# Altium PCB E_LOAD_MARCH20 - backup.PcbDoc
Units mil, origin at the board's own origin, x right, y up, seen from the top; angles counter-clockwise.
Board outline 3220 x 3110 mil, 4 copper layers (Top Layer, Ground1, Ground2, Bottom Layer), stack 30.634 mil thick; 63 components, 46 nets, 263 pads, 160 vias.
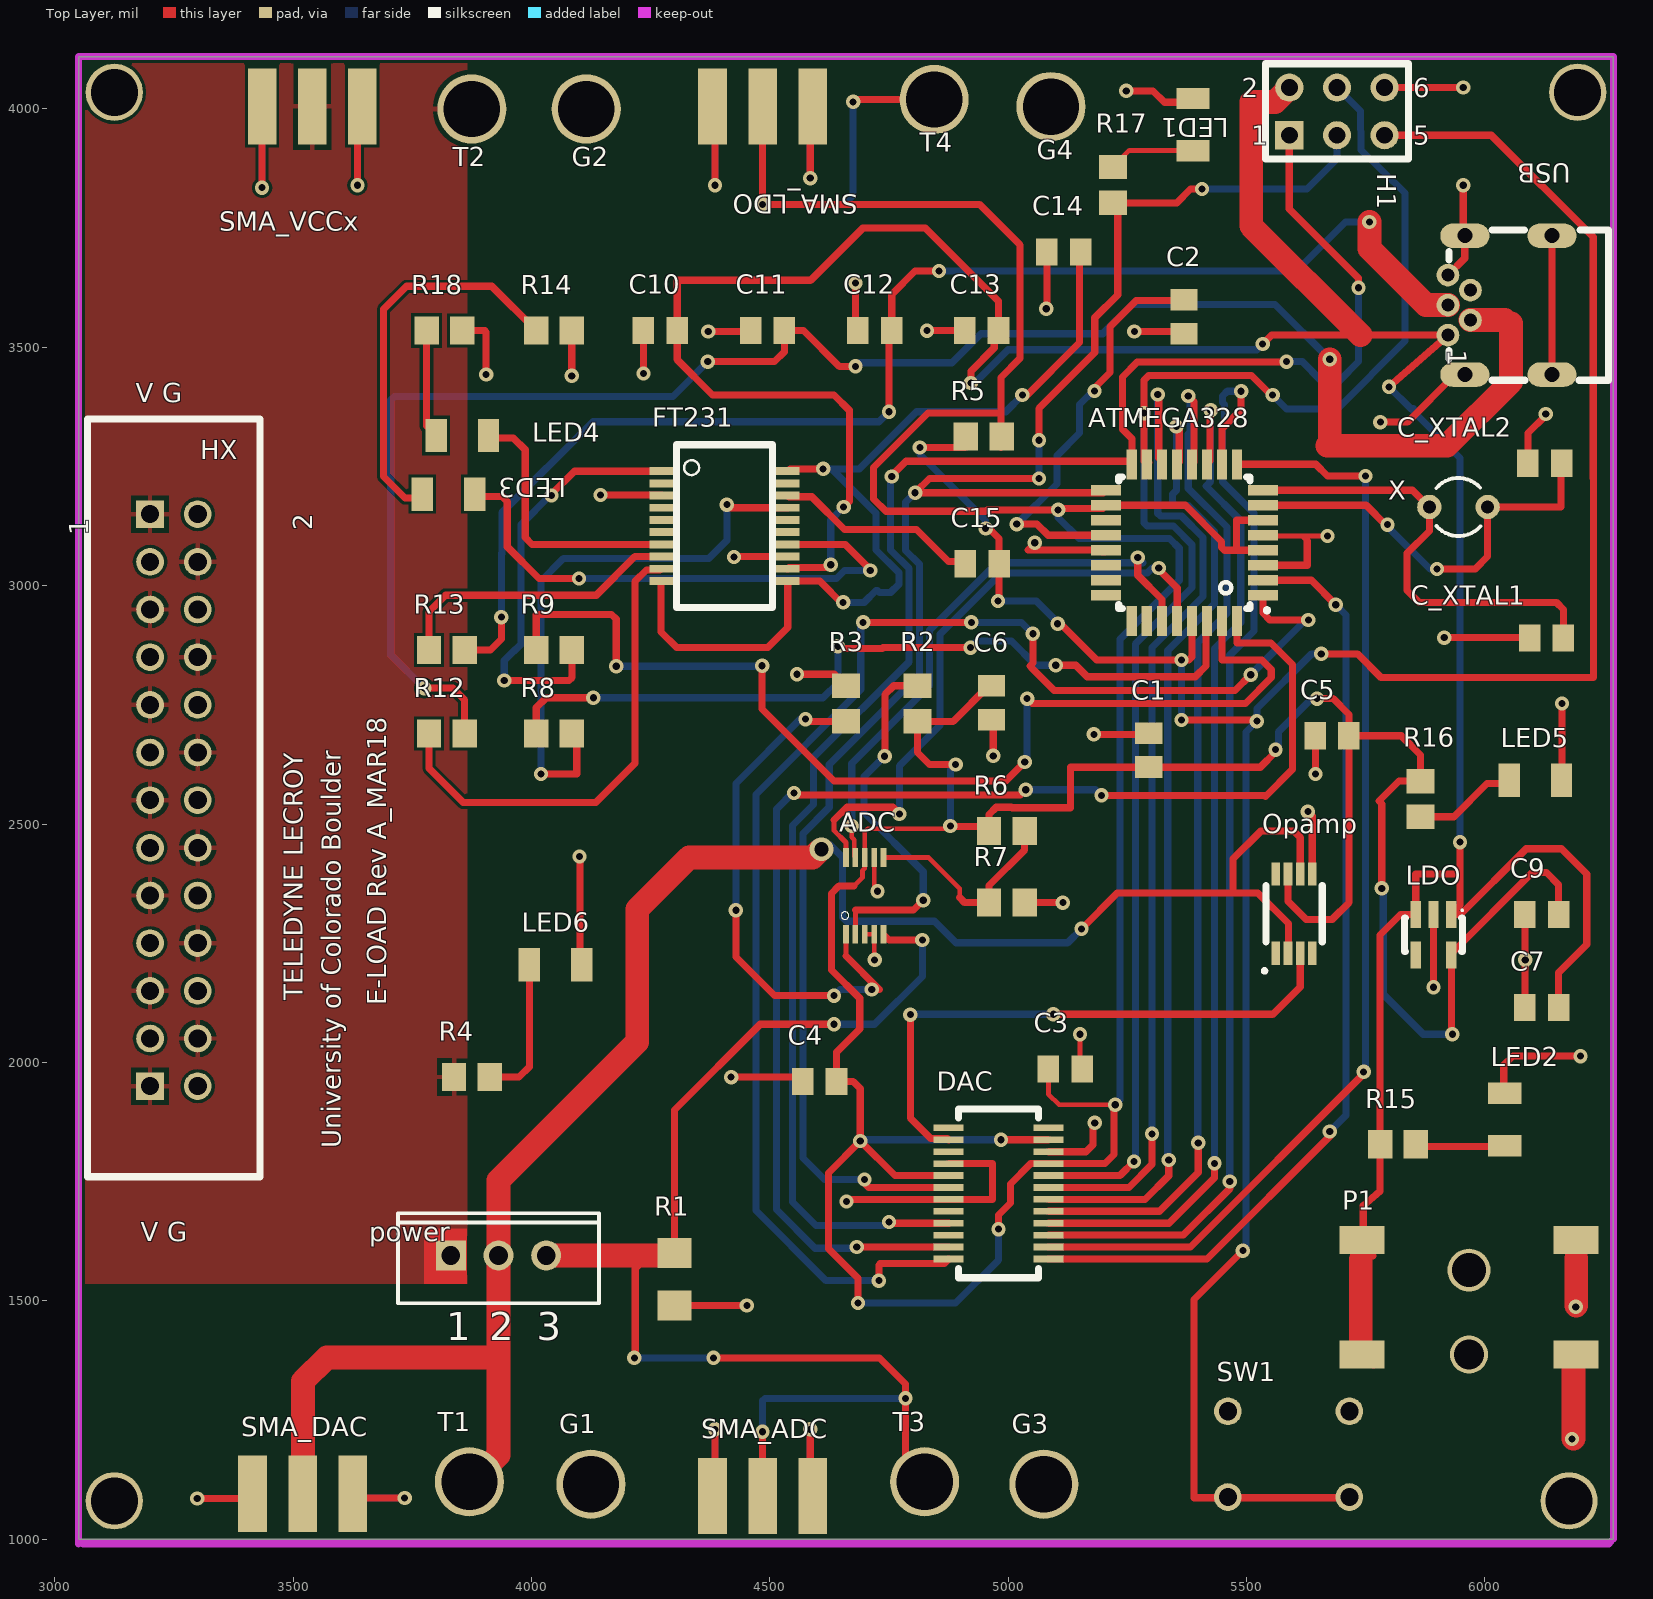
[diagram p0: Top Layer view]
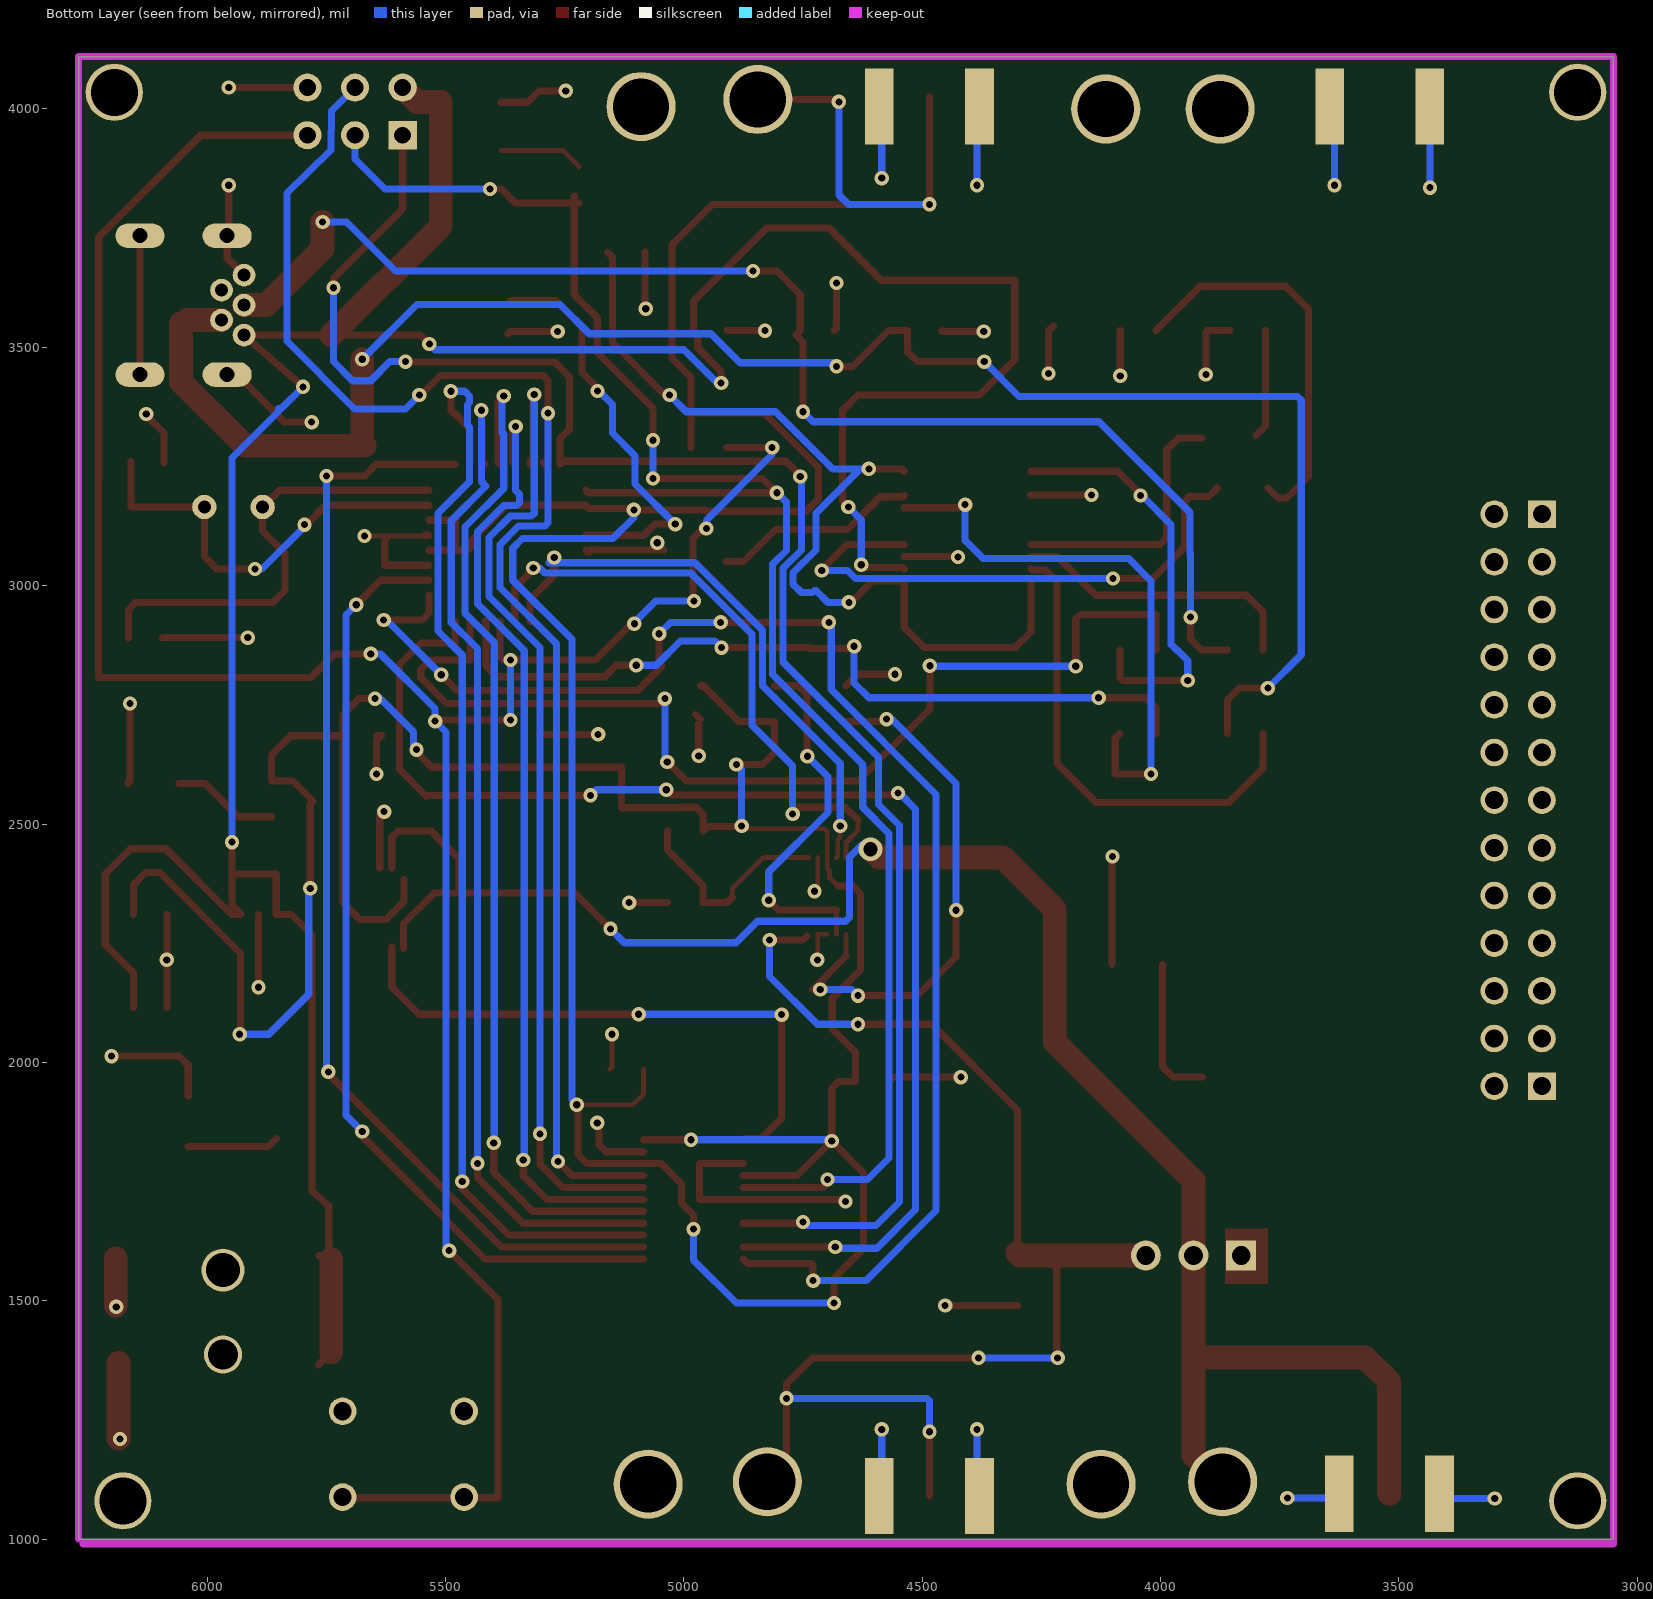
[diagram p1: Bottom Layer view, seen from below]
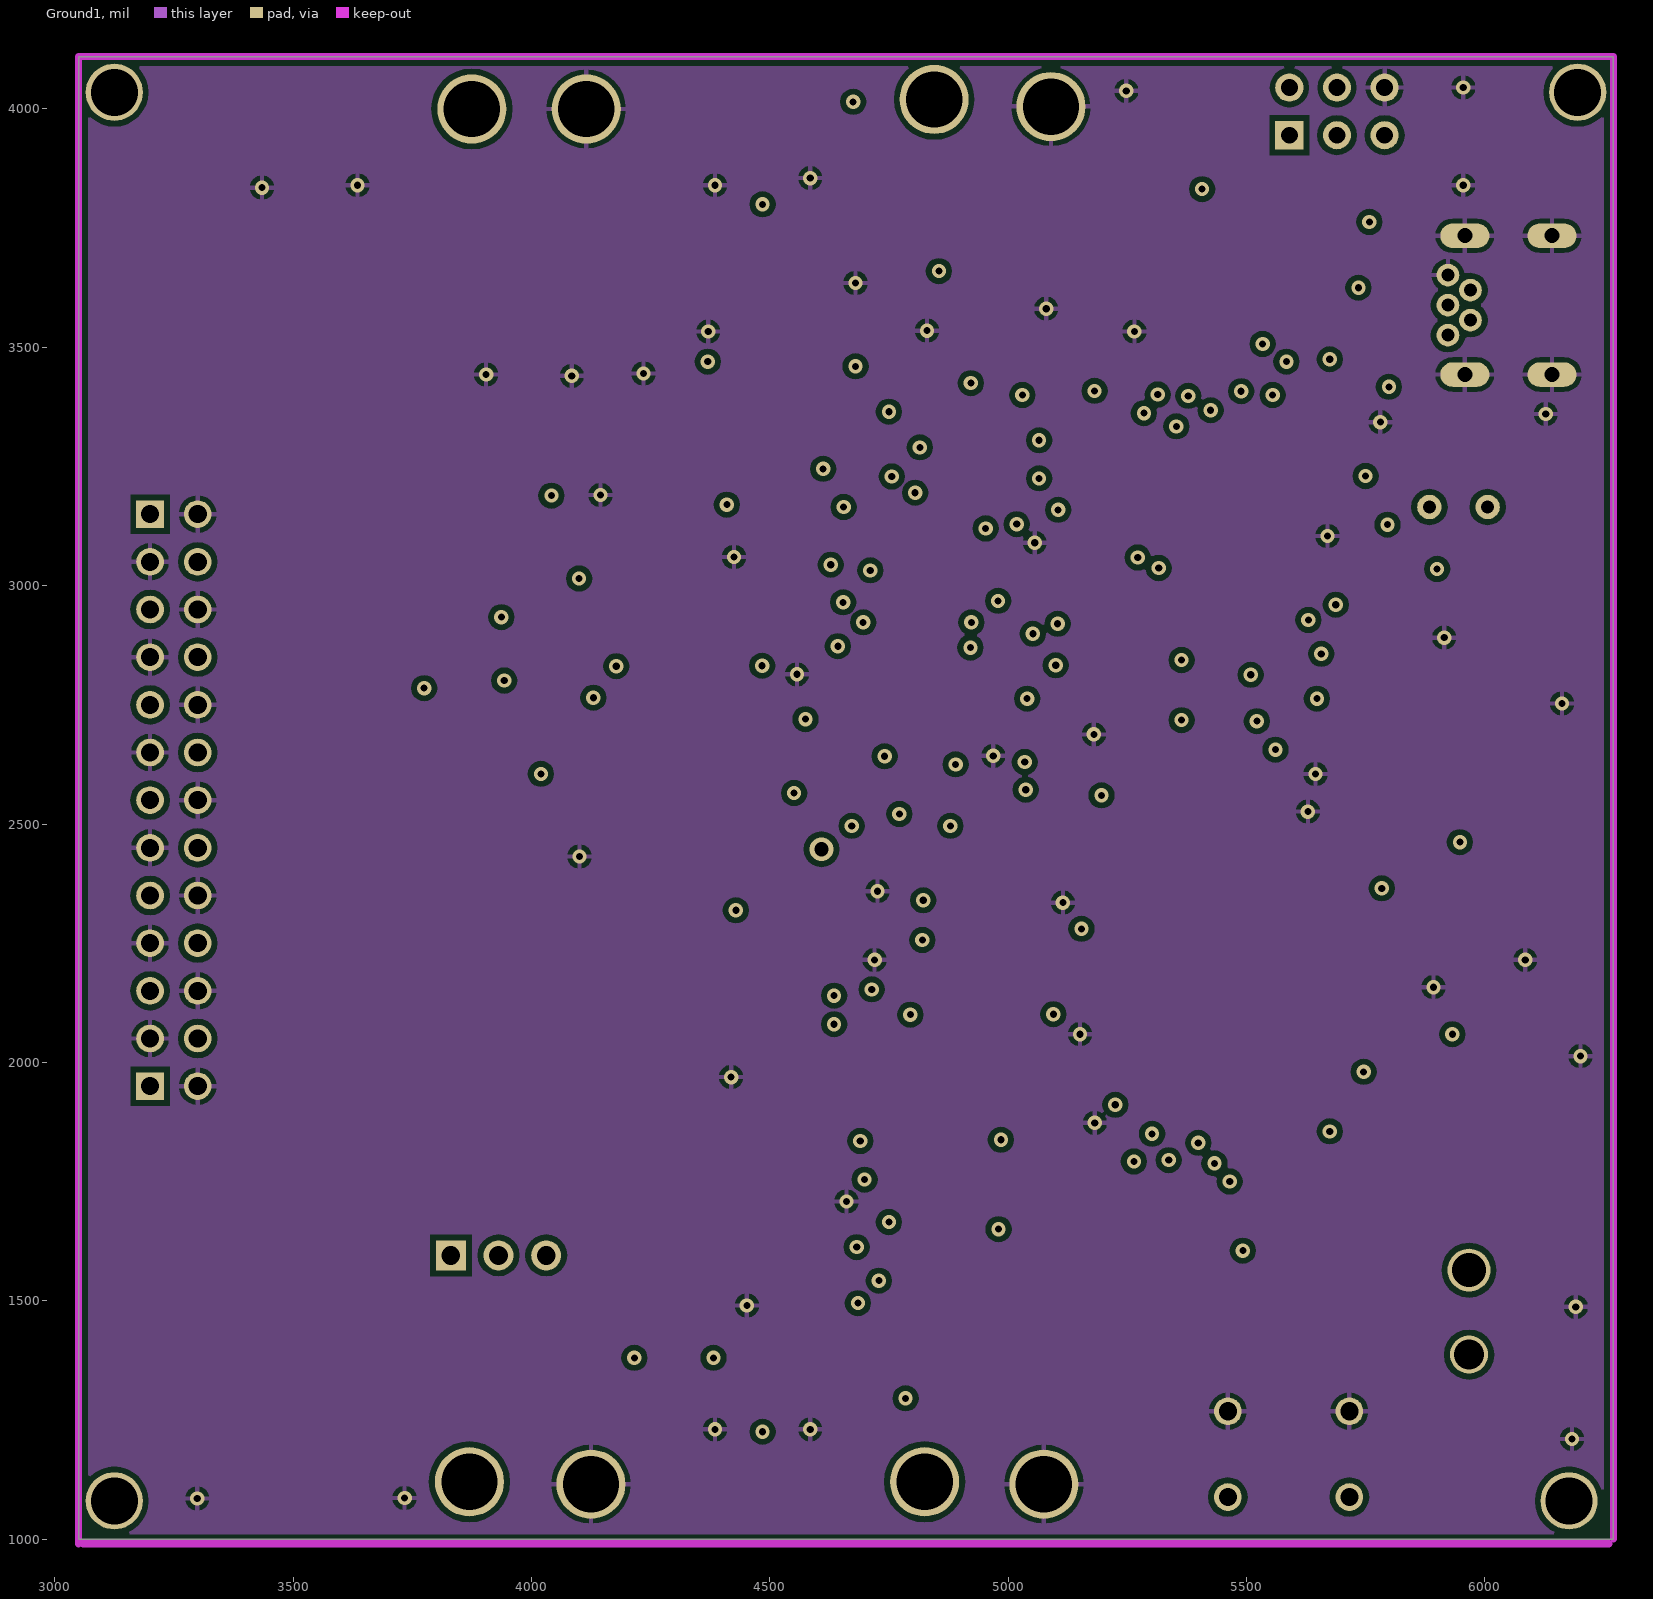
[diagram p2: Ground1]
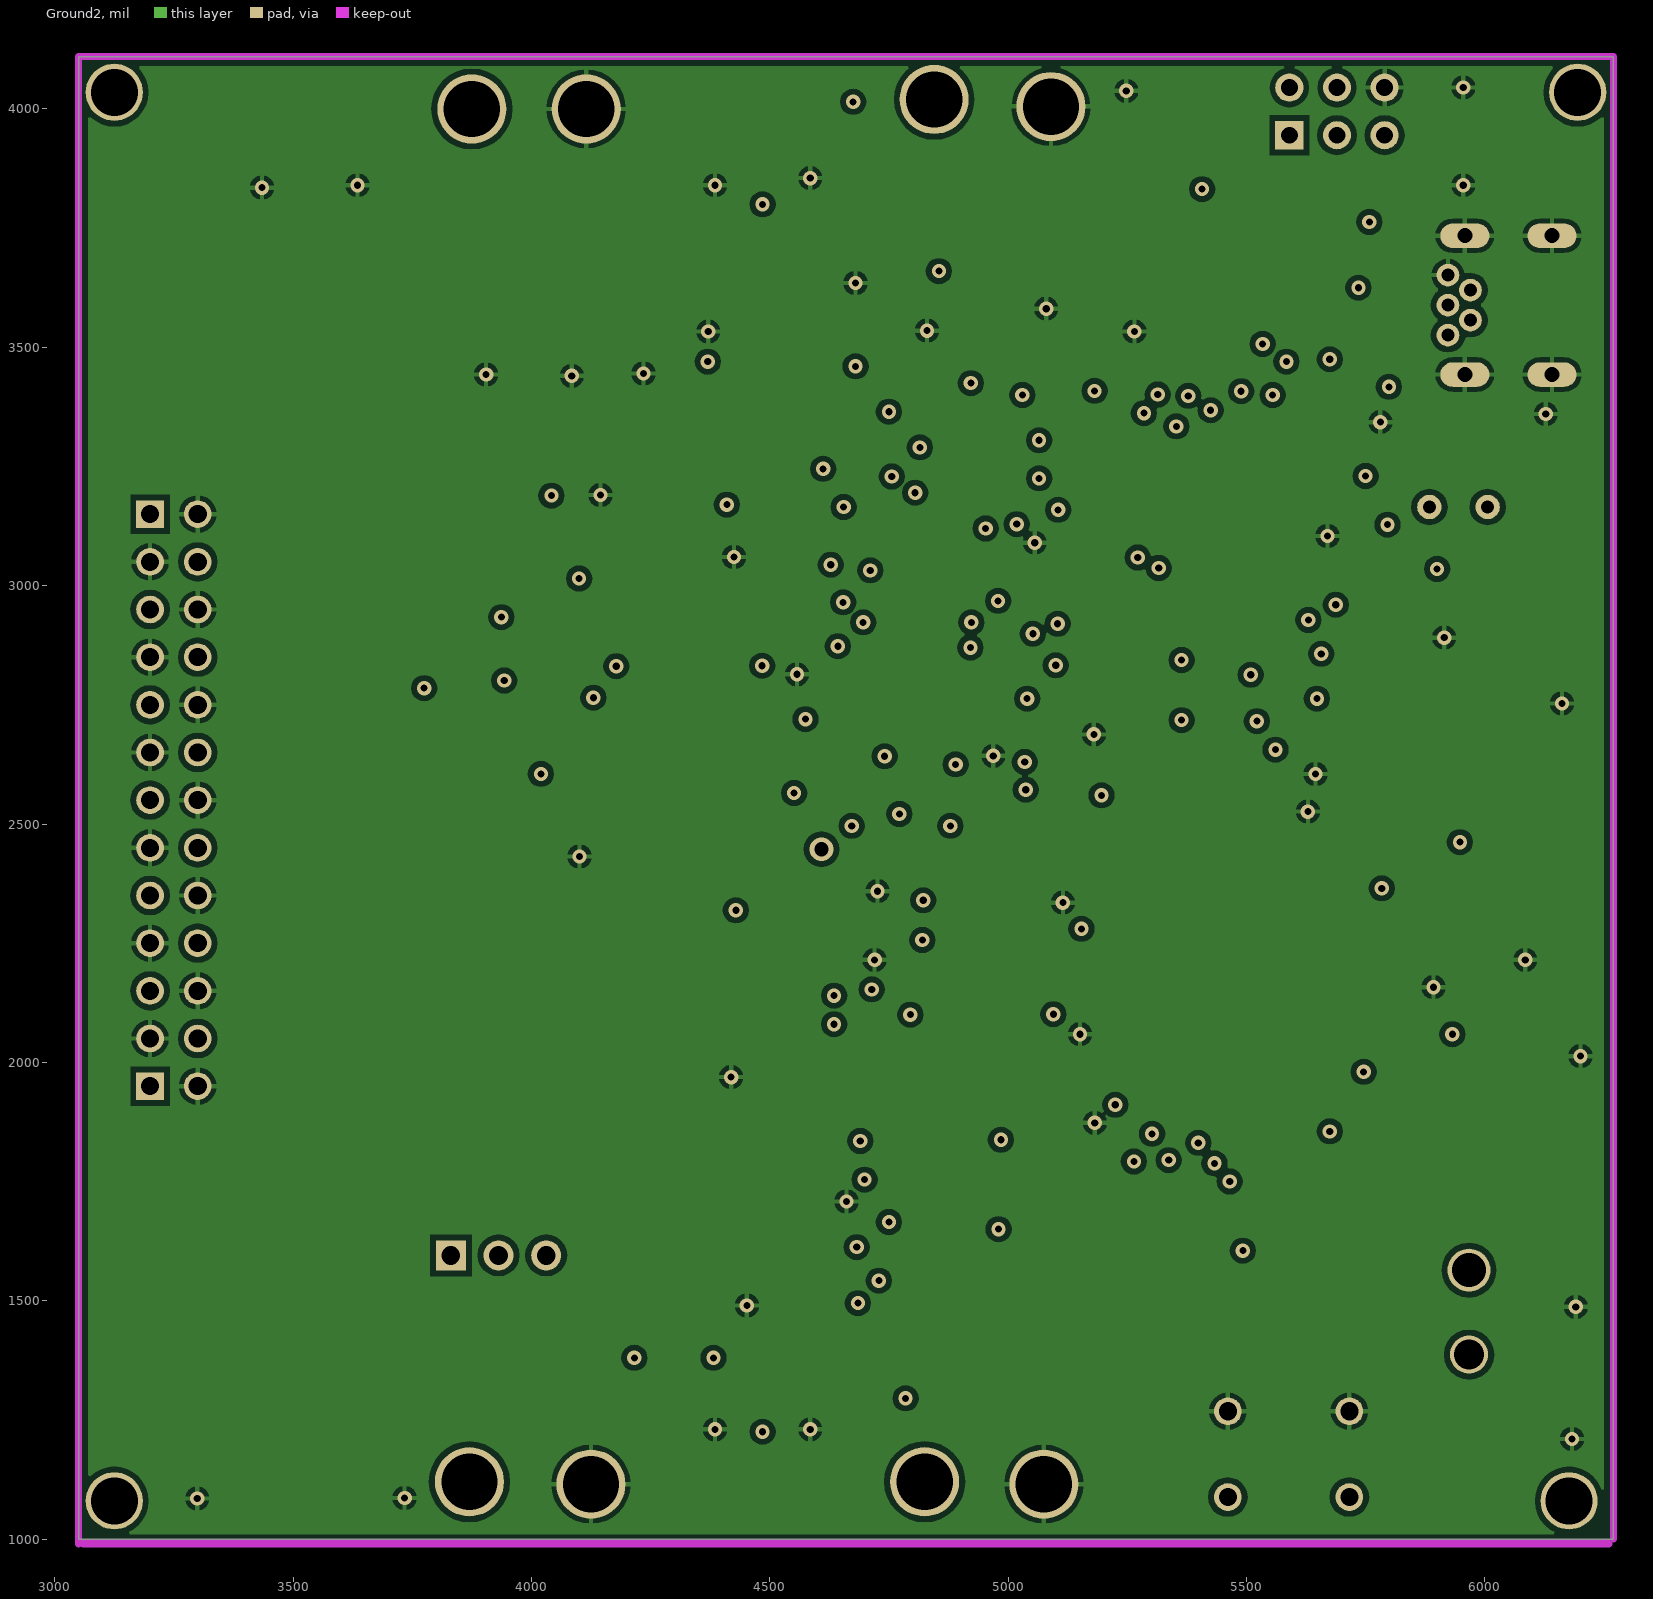
[diagram p3: Ground2]

## Layer stack, top to bottom
Top Solder: solder mask 0.4, Solder Resist, Dk 3.5
Top Layer: signal copper 1.4
Dielectric 1: core 10, FR-4, Dk 4.2
Ground1: signal copper 1.417
Dielectric 3: prepreg 5, Dk 4.2
Ground2: signal copper 1.417
Dielectric 2: core 10, Dk 4.2
Bottom Layer: signal copper 1.4
Bottom Solder: solder mask 0.4, Solder Resist, Dk 3.5

## Board outline
3050,1000 6270,1000 6270,4110 3050,4110

## Design rules (kind name [scope] priority, off if disabled: settings)
Clearance Clearance_2 [OnLayer('Ground1')] p1: gap=12 ignorepadtopadclearanceinfootprint=TRUE
Clearance Clearance_3 [OnLayer('Ground2')] p2: gap=12 ignorepadtopadclearanceinfootprint=TRUE
Clearance Clearance_1 [InNamedPolygon('Layer1_Ground1')] p3: gap=10 ignorepadtopadclearanceinfootprint=TRUE except(0: Arc-Hole Track-Hole SMDPad-Hole THPad-Hole Via-Hole Fill-Hole Poly-Hole Region-Hole Text-Hole)
Clearance [All] p4: gap=6.5 ignorepadtopadclearanceinfootprint=TRUE
HoleSize [All] p1: absolutevalues=TRUE maxlimit=120 minlimit=1 maxpercent=80.000 minpercent=20.000
PolygonConnect [All] p1: connectstyle=Relief reliefconductorwidth=10 reliefentries=4 polygonreliefangle="90 Angle" airgapwidth=10
RoutingVias RoutingVias_1 [All] p1: holewidth=12 width=30 viastyle="Through Hole" minholewidth=12 minwidth=30 maxholewidth=12 maxwidth=30
RoutingVias [All] p2 off: holewidth=12.01 width=24.02 viastyle="Through Hole" minholewidth=12.01 minwidth=24.02 maxholewidth=12.01 maxwidth=24.02
SolderMaskExpansion [All] p1: expansion=4
Width P_Width [All] p1 off: maxlimit=50 minlimit=50 preferedwidth=50 minimp=50.000000 maximp=50.000000 favimp=50.000000
Width [All] p2: maxlimit=100 minlimit=10 preferedwidth=10
29 further rules are at their usual default settings.

## Components (designator, comment, footprint, x,y, rotation, side; value= is the part's Value field where it differs from the comment)
ADC "ADC1115" MSOP10 4699.37,2349.29 r0 top
ATMEGA328 "ATmega328-AU" QFP32P80_900X900X120L60X37N 5370,3090 r180 top
C1 "Cap Semi" CAPC2012X140N 5295,2655 r90 top value=10uF
C2 "Cap Semi" CAPC2012X140N 5369,3564 r90 top value=10uF
C3 "Cap Semi" CAPC2012X140N 5120,1986 r180 top value=10uF
C4 "Cap Semi" CAPC2012X140N 4604.57,1960 r0 top value=10uF
C5 "Cap Semi" CAPC2012X140N 5679.57,2685 r0 top value=10uF
C6 "Cap Semi" CAPC2012X140N 4965,2754.57 r90 top value=10uF
C7 "Cap Semi" CAPC2012X140N 6119.57,2115 r0 top value=10uF
C9 "Cap Semi" CAPC2012X140N 6119.57,2310 r0 top value=10uF
C10 "Cap Semi" CAPC2012X140N 4270.43,3535 r0 top value=10uF
C11 "Cap Semi" CAPC2012X140N 4495.43,3535 r0 top value=47pF
C12 "Cap Semi" CAPC2012X140N 4720.43,3535 r0 top value=47pF
C13 "Cap Semi" CAPC2012X140N 4944.57,3535 r0 top value=10uF
C14 "Cap Semi" CAPC2012X140N 5117,3700 r0 top value=10uF
C15 "Cap Semi" CAPC2012X140N 4946,3046 r180 top value=10uF
C_XTAL1 "Cap Semi" CAPC2012X140N 6129.57,2890 r180 top value=22pF
C_XTAL2 "Cap Semi" CAPC2012X140N 6126,3257 r180 top value=22pF
DAC "MAX5184" 21-0055H_24 4980,1725 r0 top
FT231 "FT231XS-U" SSOP20_FT231XS-U(Primary) 4405,3125 r270 top
G1 "DAC_OUT" "1Pin Header" 4125,1115 r0 top
G2 "VCCx" "1Pin Header" 4115,4000 r0 top
G3 "ADC_IN" "1Pin Header" 5075,1115 r0 top
G4 "LDO" "1Pin Header" 5090,4005 r180 top
H1 "Header 3X2" HDR2X3 5590,3945 r0 top
HX "1761606-9" TYCO_1761606-9 3300,3150 r90 top
LDO "MIC5205" SOT23-5 5892.6,2267.68 r180 top
LED1 "LED2" LED_User 5368,3817 r270 top
LED2 "LED2" LED_User 6022,1730 r270 top
LED3 "LED2" LED_User 4005,3295 r0 top
LED4 "LED2" LED_User 3976,3172 r0 top
LED5 "LED2" LED_User 5956,2612 r180 top
LED6 "LED2" LED_User 3900.85,2225 r180 top
Opamp "Opamp" SOP65P490X110-8N 5600,2312 r90 top
P1 "PJ-002AH-SMT-TR" CUI_PJ-002AH-SMT-TR 5967,1507 r90 top
power "mosfet" TO-220-AB 3931,1595 r0 top
R1 "0.1ohm" RESC3216X65 4300,1544.88 r90 top
R2 "Res3" RESC2012X70 4810,2752.6 r90 top value=10K
R3 "Res3" RESC2012X70 4660,2752.6 r90 top value=10K
R4 "Res3" RESC2012X70 3875,1969 r180 top value=1K
R5 "Res3" RESC2012X70 4949,3313 r0 top value=10K
R6 "Res3" RESC2012X70 4997.4,2485 r0 top value=10K
R7 "Res3" RESC2012X70 4997.4,2335 r0 top value=10K
R8 "Res3" RESC2012X70 4047.6,2690 r0 top value=1K
R9 "Res3" RESC2012X70 4047.6,2865 r0 top value=1K
R12 "Res3" RESC2012X70 3822.6,2690 r0 top value=27ohm
R13 "Res3" RESC2012X70 3822.6,2865 r0 top value=27ohm
R14 "Res3" RESC2012X70 4047.4,3535 r0 top value=1K
R15 "Res3" RESC2012X70 5818,1828 r180 top value=1K
R16 "Res3" RESC2012X70 5865,2552.6 r90 top value=1K
R17 "Res3" RESC2012X70 5220,3841 r270 top value=1K
R18 "Res3" RESC2012X70 3817.6,3535 r0 top value=1K
SMA_ADC "SMA3" sma_UserDefined 4225,1230 r180 top
SMA_DAC "SMA1" sma_UserDefined 3260,1235 r180 top
SMA_LDO "SMA4" sma_UserDefined 4225,4145 r180 top
SMA_VCCx "SMA2" sma_UserDefined 3280,4145 r180 top
SW1 "switch" "PCBComponent_1 - duplicate" 5706,1258 r0 top
T1 "DAC_OUT" "1Pin Header" 3870,1120 r0 top
T2 "VCCx" "1Pin Header" 3875,4000 r0 top
T3 "ADC_IN" "1Pin Header" 4825,1120 r0 top
T4 "LDO" "1Pin Header" 4845,4020 r0 top
USB "USB" 651005136521_651005136521(Primary) 5958.19,3588.5 r270 top
X "XTAL" R38 5945,3165 r270 top

## Footprints (in the part's own frame and the unit in brackets; to place one, negate y for a bottom-side part, rotate by r counter-clockwise, add the part's x,y. Pads: shape width x height; smd on the part's side, far side on the other; paste and mask are expansions set on the pad)
"1Pin Header" [mil]
  round 145 hole 118.11: 1(0,0)
21-0055H_24 [mil]
  rect 63x14 smd: 1(-104.5,137.5) 2(-104.5,112.5) 3(-104.5,87.5) 4(-104.5,62.5) 5(-104.5,37.5) 6(-104.5,12.5) 7(-104.5,-12.5) 8(-104.5,-37.5) 9(-104.5,-62.5) 10(-104.5,-87.5) 11(-104.5,-112.5) 12(-104.5,-137.5) 13(104.5,-137.5) 14(104.5,-112.5) 15(104.5,-87.5) 16(104.5,-62.5) 17(104.5,-37.5) 18(104.5,-12.5) 19(104.5,12.5) 20(104.5,37.5) 21(104.5,62.5) 22(104.5,87.5) 23(104.5,112.5) 24(104.5,137.5)
  silkscreen extent -84,-177 84,177
651005136521_651005136521(Primary) [mm]
  round 1.208 hole 0.7: 1(1.6,-0.9) 2(0.8,0.3) 3(0,-0.9) 4(-0.8,0.3) 5(-1.6,-0.9)
  oval 1.308x2.616 hole 0.8: SHELL(-3.7,0) SHELL1(3.7,0) SHELL2(-3.7,4.65) SHELL3(3.7,4.65)
  silkscreen extent -4,-0.85 4,7.65
CAPC2012X140N [mm]
  rect 1.15x1.45 smd: 1(-0.9,0) 2(0.9,0)
CUI_PJ-002AH-SMT-TR [mm]
  rect 1.5x2.4 smd: 1(-3.05,5.7) 1(3.05,5.7) 2(-3.05,-5.7) 3(3.05,-5.7)
  round 2.032 hole 1.6 unplated: None(-3.05,0)
  round 2.286 hole 1.8 unplated: None(1.45,0)
HDR2X3 [mm] "Connector; Header; 3x2 Position"
  rect 1.5x1.5 hole 0.9: 1(0,0)
  round 1.5 hole 0.9: 2(0,2.54) 3(2.54,0) 4(2.54,2.54) 5(5.08,0) 6(5.08,2.54)
  silkscreen extent -1.27,-1.27 6.35,3.81
LED_User [mil] "Chip Capacitor, Body 3.2x1.6mm, IPC High Density"
  rect 45x70 smd: 1(-95,20) 2(-205,20)
MSOP10 [mm]
  rect 0.3x1 smd: 1(-1,-2.05) 2(-0.5,-2.05) 3(0,-2.05) 4(0.5,-2.05) 5(1,-2.05) 6(1,2.05) 7(0.5,2.05) 8(0,2.05) 9(-0.5,2.05) 10(-1,2.05)
  silkscreen extent -1.25,-1.25 -0.85,-0.85
"PCBComponent_1 - duplicate" [mil]
  round 58 hole 38: 1(10,-170) 2(-245,-170) 3(10,10) 4(-245,10)
QFP32P80_900X900X120L60X37N [mm]
  rect 1.6x0.55 smd: 1(-4.18,2.8) 2(-4.18,2) 3(-4.18,1.2) 4(-4.18,0.4) 5(-4.18,-0.4) 6(-4.18,-1.2) 7(-4.18,-2) 8(-4.18,-2.8) 17(4.18,-2.8) 18(4.18,-2) 19(4.18,-1.2) 20(4.18,-0.4) 21(4.18,0.4) 22(4.18,1.2) 23(4.18,2) 24(4.18,2.8)
  rect 0.55x1.6 smd: 9(-2.8,-4.18) 10(-2,-4.18) 11(-1.2,-4.18) 12(-0.4,-4.18) 13(0.4,-4.18) 14(1.2,-4.18) 15(2,-4.18) 16(2.8,-4.18) 25(2.8,4.18) 26(2,4.18) 27(1.2,4.18) 28(0.4,4.18) 29(-0.4,4.18) 30(-1.2,4.18) 31(-2,4.18) 32(-2.8,4.18)
  silkscreen extent -4.5,-3.5 3.5,3.7
R38 [mm] "Crystal, Thru-Hole; 2 Leads; Body 3.1 x 8.2 mm (Dia.xH)"
  round 1.3 hole 0.7: 1(0,1.55) 2(0,-1.55)
  silkscreen extent -1.55,-1.19 1.55,1.17
RESC2012X70 [mm]
  rect 1.3x1.5 smd: 1(-0.95,0) 2(0.95,0)
RESC3216X65 [mm]
  rect 1.6x1.8 smd: 1(-1.4,0) 2(1.4,0)
sma_UserDefined [mil]
  rect 60x160 smd: GND1(-365,140) GND4(-155,140) P(-260,140)
  rect 60x160 smd far side: GND2(-365,140) GND3(-155,140)
SOP65P490X110-8N [mm]
  rect 1.25x0.46 smd: 1(-2.11,0.975) 2(-2.11,0.325) 3(-2.11,-0.325) 4(-2.11,-0.975) 5(2.11,-0.975) 6(2.11,-0.325) 7(2.11,0.325) 8(2.11,0.975)
  silkscreen extent -3.15,-1.5 1.5,1.67
SOT23-5 [mm] "SOT-23/SC-74A; 5 Leads; Body 3 x 3 mm, inc. leads (LxW max)"
  rect 0.55x1.45 smd: 1(-0.95,-1.075) 2(0,-1.075) 3(0.95,-1.075) 4(0.95,1.075) 5(-0.95,1.075)
  silkscreen extent -1.58,-1.35 1.55,0.9
SSOP20_FT231XS-U(Primary) [mm]
  rect 0.42x1.25 smd: P$1(-2.925,-3.375) P$2(-2.275,-3.375) P$3(-1.625,-3.375) P$4(-0.975,-3.375) P$5(-0.325,-3.375) P$6(0.325,-3.375) P$7(0.975,-3.375) P$8(1.625,-3.375) P$9(2.275,-3.375) P$10(2.925,-3.375) P$11(2.925,3.375) P$12(2.275,3.375) P$13(1.625,3.375) P$14(0.975,3.375) P$15(0.325,3.375) P$16(-0.325,3.375) P$17(-0.975,3.375) P$18(-1.625,3.375) P$19(-2.275,3.375) P$20(-2.925,3.375)
  silkscreen extent -4.33,-2.56 4.33,2.56
TO-220-AB [mm] "TO, Thru-Hole, Vertical, Heatsink Mounted; 3 In-Line Leads; Pitch 2.54 mm"
  rect 1.6x1.6 hole 1: 1(-2.54,0)
  round 1.6 hole 1: 2(0,0) 3(2.54,0)
  silkscreen extent -5.35,-2.55 5.35,2.25
TYCO_1761606-9 [mil]
  rect 58x58 hole 38: 1(0,100) 25(-1200,100)
  round 58 hole 38: 2(0,0) 3(-100,100) 4(-100,0) 5(-200,100) 6(-200,0) 7(-300,100) 8(-300,0) 9(-400,100) 10(-400,0) 11(-500,100) 12(-500,0) 13(-600,100) 14(-600,0) 15(-700,100) 16(-700,0) 17(-800,100) 18(-800,0) 19(-900,100) 20(-900,0) 21(-1000,100) 22(-1000,0) 23(-1100,100) 24(-1100,0) 26(-1200,0)
  silkscreen extent -1390,-131 200,231

## Part data
ADC: library part ADC
ATMEGA328: "8-bit AVR Microcontroller, 32KB Flash, 1KB EEPROM, 2KB SRAM, 32-pin TQFP, Industrial Grade (-40°C to 85°C)", Supplier Part Number 1=ATMEGA328-AU-ND, Code_JEDEC=MS-026-ABA, ComponentLink1Description="Manufacturer Link", ComponentLink1URL=http://www.atmel.com/products/avr/default.asp?, ComponentLink2Description="ATmega48A/48PA/88A/88PA/168A/168PA/328/328P Datasheet", ComponentLink2URL=http://www.atmel.com/dyn/resources/prod_documents/8271.pdf, ComponentLink3Description="ATmega48A/48PA/88A/88PA/168A/168PA/328/328P Summary", ComponentLink3URL=http://www.atmel.com/dyn/resources/prod_documents/8271S.pdf, ComponentLink4Description="Atmel.com Home", ComponentLink4URL=http://www.atmel.com, DatasheetVersion="revA, Jan-2010", PackageDescription="32-Lead, 7x7x1.0 mm Body, 0.8mm Lead Pitch, Thin Profile Plastic Quad Flat Package (TQFP)", PackageReference=32A, PackageVersion="revB, Oct-2001", Published=1-Apr-2010, Publisher="Altium Limited", Supplier 1=Digi-Key, Supplier 2=Mouser, Supplier Part Number 2=556-ATMEGA328-AU
C1 C2 C3 C4 C5 C6 C7 C9 C10 C11 C12 C13 C14 C15 C_XTAL1 C_XTAL2: "Capacitor (Semiconductor SIM Model)", LatestRevisionDate=29-May-2009, LatestRevisionNote="IPC-7351 Footprint Added.", PackageDescription="Chip Capacitor", PackageReference=C1206, Published=8-Jun-2000, Publisher="Altium Limited"
FT231: "USB Full Speed to Full Handshake UART with USB Charger Detection, SSOP-20", Package="SSOP-20 FTDI", Availability=Good, MF=FTDI,, MP=FT231XS-U, Price="2.02 USD", SnapEDA_Link=https://www.snapeda.com/symbols-footprints/FT231XS-U/FTDI%2C%20Future%20Technology%20Devices%20International%20Ltd/view-part/?ref=snap
G1 G2 G3 G4 T1 T2 T3 T4: library part "1Pin Header"
H1: "Header, 3-Pin, Dual row", LatestRevisionDate=17-Jul-2002, LatestRevisionNote="Re-released for DXP Platform.", Publisher="Altium Limited"
HX: "Header, Pin, Idc, Amp-Latch, 26 Pos, Low Profile, Pcb, Vertical, Black", Package=None, Availability=Good, EU_RoHS_Compliance=Compliant, Link=http://www.te.com/usa-en/product-1761606-9.html, MF="TE Connectivity", MP=1761606-9, Price="4.02 USD", SnapEDA_Link=https://www.snapeda.com/symbols-footprints/1761606-9/TE%20Connectivity%20AMP%20Connectors/view-part/?ref=snap
LED1 LED2 LED3 LED4 LED5 LED6: "Typical RED, GREEN, YELLOW, AMBER GaAs LED", LatestRevisionDate=17-Jul-2002, LatestRevisionNote="Re-released for DXP Platform.", PackageDescription="SM LED; 2 Flat Leads", PackageReference=3.2X1.6X1.1, PackageVersion=Feb-2002, Published=8-Jun-2000, Publisher="Altium Limited"
Opamp: library part LTC6269IMS8E#PBF, "LTC6269 - Dual 500MHz Ultra-Low Bias Current FET Input Op Amp", Package="MSOP-8 Linear Technology", Availability=Warning, MF="Linear Technology", MP=LTC6269IMS8E#PBF, Price="6.38 USD", SnapEDA_Link=https://www.snapeda.com/symbols-footprints/LTC6269IMS8E%23PBF/Linear%20Technology/view-part/?ref=snap
P1: "24 VDC 5 A Surface Mount Unshielded 2 Conductors 3 Contacts Male Power Jack", Package=None, Availability=Good, MF=CUI, MP=PJ-002AH-SMT-TR, Price="1.03 USD", SnapEDA_Link=https://www.snapeda.com/symbols-footprints/PJ-002AH-SMT-TR/CUI%20Inc/view-part/?ref=snap
power: library part MOSFET-N, "N-Channel MOSFET", LatestRevisionDate=17-Jul-2002, LatestRevisionNote="Re-released for DXP Platform.", PackageDescription="TO, Flat Index; 3 In-Line, Axial Leads; Body Dia. 4.6mm; Lead Dia. 0.5 mm (max)", PackageReference=E3, PackageVersion=1995/1996, Published=8-Jun-2000, Publisher="Altium Limited"
R1: library part Res3, "Resistor", LatestRevisionDate=29-May-2009, LatestRevisionNote="IPC-7351 Footprint Added.", PackageDescription="Chip Resistor", PackageReference=J1-0603, Published=8-Jun-2000, Publisher="Altium Limited"
R2 R3 R4 R5 R6 R7 R8 R9 R12 R13 R14 R15 R16 R17 R18: "Resistor", LatestRevisionDate=29-May-2009, LatestRevisionNote="IPC-7351 Footprint Added.", PackageDescription="Chip Resistor", PackageReference=J1-0603, Published=8-Jun-2000, Publisher="Altium Limited"
SMA_ADC SMA_DAC SMA_LDO SMA_VCCx: library part 1865, "Edge-Launch SMA Connector for 1.6mm / 0.062 Thick PCBs", Package=None, Availability=Bad, MF=Keystone, MP=1865, Price="2.38 USD", SnapEDA_Link=https://www.snapeda.com/symbols-footprints/1865/Keystone%20Electronics/view-part/?ref=snap
SW1: library part 1-1825910-4, "Switch Tactile OFF (ON) SPST Round Button PC Pins 0.05A 24VDC 100000Cycles 1.56N Thru-Hole Loose", Package=None, Availability=Good, MF="TE Connectivity", MP=118259104, Price="0.07 USD", SnapEDA_Link=https://www.snapeda.com/symbols-footprints/118259104/TE%20Connectivity/view-part/?ref=snap
USB: library part 651005136521, "MINI USB A - 5POS Horizontal through hole", Package=None, Availability=Good, MF="Wurth Electronics", MP=651005136521, Price="1.78 USD", SnapEDA_Link=https://www.snapeda.com/symbols-footprints/651005136521/Wurth%20Electronics%20Inc/view-part/?ref=snap
X: "Crystal Oscillator", LatestRevisionDate=17-Jul-2002, LatestRevisionNote="Re-released for DXP Platform.", PackageDescription="Crystal, Thru-Hole; 2 Leads; Body 3.1 x 8.2 mm (Dia.xH)", PackageReference=R38, Published=8-Jun-2000, Publisher="Altium Limited"

## Free pads (board coordinates)
  round 120 hole 98.43: 3(3125,1080) 3(3125,4035) 3(6177,1080) 3(6195,4035)

## Via types
v1: diameter 30, hole 15, Top Layer to Bottom Layer, 159 vias
v2: diameter 50, hole 30, Top Layer to Bottom Layer, 1 vias

## Nets (pads, with @x,y where several pads share a name; then routed paths per layer and width w, separated by ;. In a path a pad name is that pad's centre, name@x,y a point inside that pad or via, vN(x,y) a via of type N, cw(c..) or ccw(c..) an arc to the next point about the centre after c; other vN are vias at no path point)
DTR: C15.2 FT231.P$18 | length 431.3
  Top Layer w15: FT231.P$18 4540.2,3186.65 4588.35,3186.65 4657,3118 4808,3118 4875,3051 C15.2@4912,3051
GND: ADC.3 ADC.4 ADC.7 ATMEGA328.3 ATMEGA328.5 ATMEGA328.21 C1.2 C2.1 C3.1 C4.1 C5.1 C6.1 C7.1 C9.1 C10.1 C11.1 C12.1 C13.1 C14.1 C_XTAL1.2 C_XTAL2.2 DAC.4 DAC.7 DAC.22 FT231.P$3 FT231.P$13 G1.1 G2.1 G3.1 G4.1 H1.6 HX.2 HX.3 HX.6 HX.7 HX.10 HX.11 HX.14 HX.15 HX.18 HX.19 HX.22 HX.23 HX.26 LDO.2 LED1.2 LED2.2 LED5.2 LED6.2 Opamp.5 P1.2 P1.3 R1.1 R3.2 R7.2 R14.2 R18.2 SMA_ADC.GND1 SMA_ADC.GND2 SMA_ADC.GND3 SMA_ADC.GND4 SMA_DAC.GND1 SMA_DAC.GND2 SMA_DAC.GND3 SMA_DAC.GND4 SMA_LDO.GND1 SMA_LDO.GND2 SMA_LDO.GND3 SMA_LDO.GND4 SMA_VCCx.GND1 SMA_VCCx.GND2 SMA_VCCx.GND3 SMA_VCCx.GND4 SW1.3 SW1.4 USB.5 USB.SHELL USB.SHELL1 USB.SHELL2 USB.SHELL3 | length 8562.3
  Top Layer w10: ADC.3 ADC.4 v1@4719.05,2215.95 ; ADC.7 4719.05,2365.95 v1(4726,2359) ; v1(5151,2059) 5151,1990.43 C3.1 ; ATMEGA328.5@5543,3105.75 5544.75,3104 5617,3104 ; 5627.76,3093.24 5617,3104 ; v1(5670,3104) 5617,3104
  Top Layer w15: v1(3299,1085) SMA_DAC.GND4@3435,1085 ; v1(3435,3835) SMA_VCCx.GND4 SMA_VCCx.GND4@3435,4030 ; SMA_DAC.GND1@3635,1085 3636,1086 v1(3734,1086) ; v1(3635,3840) 3635,4030 SMA_VCCx.GND1@3645,4040 ; R18.2 3902,3535 3905,3532 v1(3905,3443) ; v1(4084.8,3440.2) R14.2 ; v1(4101,2432) 4102,2431 4102,2354 4102.15,2354.15 LED6.2@4102.15,2205 ; v1(4145,3190) 4271.1,3190 FT231.P$3 FT231.P$3@4273.15,3190 ; C10.1@4225,3545 C10.1 v1(4235,3445) ; R1.1 4300.24,1490 v1(4452,1490) ; SMA_LDO.GND4@4365,4045 4385,4025 v1(4385,3840) ; v1(4371,3533) 4458,3533 C11.1 ; SMA_ADC.GND4@4385,1080 v1(4385,1230) ; v1(4419,1969) 4560.13,1969 C4.1 ; v1(4425,3060) 4426.02,3061.02 FT231.P$13 ; v1(4557,2814) 4636,2814 R3.2 ; v1(4585,1230) 4585,1055 SMA_ADC.GND1@4610,1030 ; v1(4585,3855) SMA_LDO.GND1@4585,4025 ; v1@4661,1712.5 DAC.7 4967.5,1712.5 4967.5,1787.5 DAC.4 ; v1(4680,3635) 4680,3540 C12.1 ; v1@4719.05,2215.95 v1(4720,2215) ; v1(4830,3535) C13.1 ; C6.1 C6.1@4975.87,2730 ; v1(4969,2643) 4969,2709 C6.1@4970,2710 ; R7.2 v1(5115,2335) ; v1(5056,3090) 5056,3089 5042,3075 5190.59,3075 5192.64,3077.05 5198.55,3071.13 5202.32,3071.13 ATMEGA328.21 ; v1(5080,3581) 5081.57,3582.57 C14.1 ; DAC.22 5163.5,1812.5 5178,1827 5178,1869 v1(5182,1873) ; v1(5180,2688) 5301,2688 C1.2@5303,2690 ; v1(5248,4038) 5304,4038 5328,4014 LED1.2@5384,4014 ; v1(5265,3533) 5364.57,3533 C2.1 ; ATMEGA328.3 5627.76,3042.76 5627.76,3093.24 ; ATMEGA328.5 ATMEGA328.5@5543,3105.75 ; v1(5629,2526) 5638,2517 Opamp.5@5638,2408.07 ; C5.1 5635,2685 5645,2675 v1(5645,2605) ; v1(5781,3343) 5838,3343 5937.83,3442.83 USB.SHELL1 ; H1.6 v1(5955,4045) ; v1(5892.6,2157.6) LDO.2 ; v1(5915,2891) 6093.13,2891 C_XTAL1.2 ; USB.5 5958.19,3686.93 USB.SHELL 5955,3737.36 v1(5955,3840) ; LED2.2@6040,1930 6040,1994 6059,2013 v1(6201,2013) ; C7.1 C9.1 ; C_XTAL2.2@6091,3257 6091,3320 6128,3357 v1(6128,3360) ; USB.SHELL3@6130,3431.57 USB.SHELL3 USB.SHELL2 ; v1(6162,2753) 6162,2590 6166,2586 LED5.2@6165,2585 ; v1(6183,1210) 6185,1210 v1@6186,1211
  Top Layer w50: v1@6186,1211 P1.2@6186,1369 ; v1@6192,1489.82 6192,1589
  Bottom Layer w15: v1(3299,1085) SMA_DAC.GND3@3435,1085 ; v1(3435,3835) SMA_VCCx.GND3 SMA_VCCx.GND3@3435,4030 ; SMA_DAC.GND2@3635,1085 3636,1086 v1(3734,1086) ; v1(3635,3840) SMA_VCCx.GND2@3635,4030 ; v1(4084.8,3440.2) v1@4085,3440 ; SMA_ADC.GND3@4385,1080 v1(4385,1230) ; v1(4385,3840) SMA_LDO.GND3@4385,4025 ; v1@4420,3060 v1(4425,3060) ; SMA_ADC.GND2@4585,1080 v1(4585,1230) ; v1(4585,3855) SMA_LDO.GND2@4585,4025
  other v1: 6191,1487 4661,1708 6085,2215
MOSI: ATMEGA328.15 DAC.20 H1.4 | length 3300.7
  Top Layer w15: DAC.20 5235.12,1762.95 v1(5264,1792) ; ATMEGA328.15@5295,3258.31 ATMEGA328.15 5285,3260.83 v1(5285,3362) 5285,3431 5295,3441 5510.77,3441 5551.77,3400 v1(5555,3400)
  Bottom Layer w15: v1@5267,1792 5267,2877.41 5385.71,2996.11 5385.71,3007.17 5386,3078 5386,3086 5347,3125 5292,3125 5285,3132 v1(5285,3362) ; v1(5555,3400) 5584.14,3370.86 5690.86,3370.86 5833,3513 5833,3823.55 5740.27,3913.97 5739.23,3995.77 H1.4
NetADC_1: ADC.1 R3.1 | length 1142
  Top Layer w10: 4660,2222.8 ADC.1
  Top Layer w15: v1(4429,2319) 4429,2221 4510,2140 v1(4635,2140) v1@4635,2144.9 ; v1(4575,2720) 4579.8,2715.2 R3.1 ; 4660,2222.8 4729.8,2153 v1(4714,2153)
  Bottom Layer w15: v1(4429,2319) 4429,2585 4564,2720 v1(4575,2720) ; v1(4635,2140) 4648,2153 v1(4714,2153)
NetADC_2: ADC.2 R2.2 | length 778.9
  Top Layer w10: ADC.2 4679.68,2319.68
  Top Layer w15: 4679.68,2319.68 4801.68,2319.68 v1(4822,2340) ; v1(4741,2642) 4742,2643 4742,2772 4760,2790 R2.2
  Bottom Layer w15: v1(4741,2642) 4698,2599 4698,2523.82 4822,2399.82 v1(4822,2340)
NetADC_5: ADC.5 power.3 R1.2 SMA_ADC.P T3.1 | length 2916.7
  Top Layer w15: v1(4216,1380) 4218,1382 4218,1568 4245,1595 ; R1.2 4300,1900 4480,2080 v1(4635,2080) ; v1(4382,1380) 4730,1380 4785,1325 v1(4785,1295) 4785,1147 T3.1@4822,1110 ; SMA_ADC.P v1(4485,1225) ; ADC.5@4742,2265 4750.39,2256.61 v1(4820.25,2256.61)
  Top Layer w50: power.3 4245,1595 4295,1595 R1.2
  Bottom Layer w15: v1(4216,1380) v1(4382,1380) ; v1(4485,1225) 4485,1290 4490,1295 v1(4785,1295) ; v1(4635,2080) 4720,2080 4820.25,2180.25 v1(4820.25,2256.61)
NetADC_6: ADC.6 R6.2 R7.1 | length 452.7
  Top Layer w10: ADC.6 4833,2430 4898.5,2364.5 4898.5,2345.5
  Top Layer w15: 4898.5,2345.5 4909,2335 R7.1 4960,2370.74 5034.8,2445.54 R6.2
NetATMEGA328_1: ATMEGA328.1 DAC.12 | length 3068.7
  Top Layer w15: v1(4696,2923) v1(4923,2923) ; v1(4729,1542) 4729,1575 4732,1578 4866,1578 DAC.12 ; 5046,2831.77 5052,2837.77 v1(5052,2899) ; 5048,2829 5097,2780 5476,2780 v1(5509,2813) ; ATMEGA328.1 5534.57,2942.43 5549,2928 v1(5630,2928)
  Bottom Layer w15: v1@4691,2917 4691,2782 4471,2562 4471,1689 4618,1542 v1(4729,1542) ; v1(4923,2923) 5028,2923 v1(5052,2899) v1@5052,2891 ; v1(5509,2813) 5624,2928 v1(5630,2928)
NetATMEGA328_2: ATMEGA328.2 DAC.13 | length 2009.3
  Top Layer w15: DAC.13 5417.5,1587.5 5675,1845 v1(5675,1855) ; ATMEGA328.2 5636.26,3011.26 v1(5687.52,2960)
  Bottom Layer w15: v1(5675,1855) 5709,1889 5709,2938.52 v1(5687.52,2960)
NetATMEGA328_7: ATMEGA328.7 C_XTAL2.1 X.1 | length 898.6
  Top Layer w15: ATMEGA328.7 5751.26,3168.74 5792,3128 v1(5796,3128) ; v1(5900,3035) 5980,3035 6006.02,3061.02 X.1 6160,3165 C_XTAL2.1@6160,3260
  Bottom Layer w15: v1(5796,3128) 5792,3128 5885,3035 v1(5900,3035)
NetATMEGA328_8: ATMEGA328.8 C_XTAL1.1 X.2 | length 963
  Top Layer w15: ATMEGA328.8 5848.74,3200.24 X.2 5883.98,3114.98 5837,3068 5837,2990 5862,2965 6150,2965 6165,2950 C_XTAL1.1
NetATMEGA328_9: ATMEGA328.9 DAC.14 | length 2350
  Top Layer w15: DAC.14 5382.5,1612.5 5746,1976 v1(5746,1980) ; ATMEGA328.9 5645.43,3254.57 5670,3230 v1(5750,3230)
  Bottom Layer w15: v1(5746,1980) 5750,1980 v1(5750,3230)
NetATMEGA328_10: ATMEGA328.10 DAC.15 | length 2350.7
  Top Layer w15: DAC.15 5367.5,1637.5 5465,1735 v1(5465,1750) ; ATMEGA328.10@5450,3253.31 ATMEGA328.10 5448.74,3328.74 5489,3369 v1(5489,3408)
  Bottom Layer w15: v1(5465,1750) 5465,2854 5516,2905 5516,3152.09 5450,3218.09 5450,3332.99 5454,3336.99 5454,3380.01 5450,3384.01 5450,3398 5460,3408 v1(5489,3408)
NetATMEGA328_11: ATMEGA328.11 DAC.16 | length 2171.9
  Top Layer w15: DAC.16 5337.5,1662.5 5433,1758 v1(5433,1788) ; ATMEGA328.11 5423.91,3261.24 5423.91,3366.91 v1(5425,3368)
  Bottom Layer w15: v1(5425,3368) 5425,3219 5415,3209 5488,3136 5488,2923 5433,2868 v1(5433,1788)
NetATMEGA328_12: ATMEGA328.12 DAC.17 | length 2191
  Top Layer w15: DAC.17 5317.5,1687.5 5399,1769 v1(5399,1831) ; v1(5378,3398) 5390,3386 5390,3258.82 ATMEGA328.12 ATMEGA328.12@5385,3253.82
  Bottom Layer w15: v1(5378,3398) 5382,3394 5382,3321.99 5378,3317.99 5378,3204 5459,3123 5459,2942 5398,2881 5398,1832 v1(5399,1831)
NetATMEGA328_13: ATMEGA328.13 DAC.18 | length 2027
  Top Layer w15: DAC.18 5287.5,1712.5 5337,1762 v1(5337,1795) ; v1(5353,3334) 5359.05,3327.95 5359.05,3259.36 ATMEGA328.13 ATMEGA328.13@5355,3253.82
  Bottom Layer w15: v1(5337,1795) 5335,1797 5335,2864 5433,2962 5433,3113 5378,3168 5351,3168 5345,3174 5345,3191.72 5353,3199.72 v1(5353,3334)
NetATMEGA328_14: ATMEGA328.14 DAC.19 | length 2110.9
  Top Layer w15: DAC.19 5253.5,1737.5 5302,1786 v1(5302,1850) ; v1(5314,3401) 5316.09,3398.91 5316.09,3267.63 5322.76,3260.96 ATMEGA328.14 ATMEGA328.14@5320,3251.81
  Bottom Layer w15: v1(5302,1850) 5302,2870 5409,2977 5409,3101 5364.5,3145.5 ; v1(5314,3401) 5314,3152 5319.5,3146.5 5359.82,3146.5
NetATMEGA328_20: ATMEGA328.20 C2.2 | length 869.5
  Top Layer w15: v1(5018.19,3129) 5061,3129 5084.25,3105.75 ATMEGA328.20 ; v1(5181.5,3408.5) 5181.5,3414.5 5214,3447 5214,3543 5269,3598 C2.2@5364,3598
  Bottom Layer w15: v1@5016.09,3126.91 v1(5018.19,3129) 5102.5,3213.31 5102.5,3272.5 5150,3320 5150,3380 5178.5,3408.5 v1(5181.5,3408.5)
NetATMEGA328_32: ATMEGA328.32 DAC.11 | length 2768.9
  Top Layer w15: v1(4551,2565) 4555,2561 5026,2561 v1(5037,2572) ; v1(4682.5,1612.5) DAC.11 ; v1(5196,2560) 5538,2560 5540,2558 5597,2615 5597,2834.57 5551.57,2880 5480.24,2880 ATMEGA328.32
  Bottom Layer w15: v1@4549.5,2566.5 4514,2531 4514,1691 4595,1610 4680,1610 v1(4682.5,1612.5) ; v1(5037,2572) 5183,2572 v1@5196,2559
NetC11_2: C11.2 R12.2 USB.2 | length 3806.1
  Top Layer w15: v1(3775,2785) 3835,2785 3860,2760 R12.2 ; v1(4370,3470) 4510,3470 4530.87,3490.87 C11.2 4571,3535 4646,3460 v1(4680,3460) ; 5669.55,3293.66 5675,3299.11
  Top Layer w50: 5669.55,3293.66 5920.67,3293.66 6054.76,3427.75 6054.76,3550.24 ; 5675,3299.11 v1(5675,3475) ; USB.2 6042.01,3557.01
  Bottom Layer w15: v1(3775,2785) 3705,2855 3705,3389 3713,3397 4297,3397 v1(4370,3470) ; v1(4680,3460) 4687.5,3467.5 4882.5,3467.5 4943.5,3528.5 5198.5,3528.5 5260,3590 5560,3590 v1(5675,3475)
NetC12_2: C12.2 R13.2 USB.3 | length 2844.6
  Top Layer w15: R13.2 3914,2865 3937,2888 v1(3937,2934) ; v1(4750,3365) 4750,3510.87 4765,3525.87 C12.2 4755.87,3610.87 4805,3660 v1(4855,3660)
  Top Layer w50: v1(5758,3763) 5758,3707 5876.5,3588.5 USB.3
  Bottom Layer w15: v1(3937,2934) 3937,3068 3938,3067 3938,3153 4129,3344 4729,3344 v1(4750,3365) ; v1(4855,3660) 5605,3660 5708,3763 v1(5758,3763)
NetC14_2: C14.2 FT231.P$10 FT231.P$11 FT231.P$20 | length 1999.9
  Top Layer w15: FT231.P$10 4272.13,2902.87 4305,2870 4495.75,2870 4537.87,2912.13 FT231.P$11 4604.84,3009.84 4654,2960.68 v1(4654,2965) ; FT231.P$20 4538.03,3240 4543.03,3245 v1(4612,3245) ; v1(5030,3400) 5035,3395 5150,3510 5150,3689 C14.2@5160,3699
  Bottom Layer w15: v1(4612,3245) 4630,3245 ; v1(4654,2965) 4698.23,2965 4723,2989.77 4726.22,2989.77 4729.99,2986 4754.01,2986 4771,3002.99 4771,3027.01 4723,3075.01 4723,3152 4630,3245 ; v1(5030,3400) 4995,3365 4808,3365 4688,3245 4630,3245
NetDAC_2: DAC.2 Opamp.3 | length 1243
  Top Layer w15: v1(4795,2100) 4795,1883.29 4837.79,1840.5 4872.5,1840.5 DAC.2 ; v1(5095,2101) 5554,2101 5555,2100 5613,2158 Opamp.3@5613,2241.93
  Bottom Layer w15: v1(4795,2100) 4796,2101 v1(5095,2101)
NetFT231_P$1: FT231.P$1 R9.2 | length 914.1
  Top Layer w15: v1(3943,2801) 4079,2801 4085,2807 R9.2 ; v1(4042,3189) 4042,3192 4090.16,3240.16 FT231.P$1
  Bottom Layer w15: v1(3943,2801) 3943,2843 3966,2866 ; 3946.88,2846.12 3978,2877.23 3978,3128 4039,3189 v1(4042,3189)
NetFT231_P$8: FT231.P$8 R13.1 | length 615.1
  Top Layer w15: R13.1 3785.2,2945.2 3820,2980 4136,2980 4217.02,3061.02 FT231.P$8
NetFT231_P$9: FT231.P$9 R12.1 | length 1016.7
  Top Layer w15: R12.1 3785.2,2616.8 3857,2545 4135,2545 4217,2627 4217,3008.8 4241.31,3033.11 4269.8,3033.11 FT231.P$9
NetFT231_P$17: FT231.P$17 R8.2 | length 1200
  Top Layer w15: v1(4020,2605) 4095,2605 4095,2680 R8.2 ; v1(4410,3170) 4416.61,3163.39 FT231.P$17
  Bottom Layer w15: v1(4020,2605) 4020,3010 4067,3057 4372,3057 4410,3095 v1(4410,3170)
NetLED1_1: LED1.1 R17.1 | length 177.3
  Top Layer w10: R17.1 5254.6,3913 LED1.1@5383,3913
NetLED2_1: LED2.1 R15.1 | length 191.8
  Top Layer w15: R15.1@5855,1840 5871.3,1823.7 LED2.1@6040,1823.7
NetLED3_2: LED3.2 R18.1 | length 228.2
  Top Layer w15: R18.1 3780.2,3334.8 LED3.2
NetLED4_2: LED4.2 R14.1 | length 841.7
  Top Layer w15: LED4.2@3775,3205 3754,3184 3735,3184 3690,3229 3690,3580 3738,3628 3917,3628 R14.1
NetLED5_1: LED5.1 R16.1 | length 222.6
  Top Layer w15: R16.1 5935.2,2515.2 6005,2585 LED5.1@6058.7,2585
NetLED6_1: LED6.1 R4.1 | length 306.6
  Top Layer w15: R4.1 3974,1969 3995.85,1990.85 LED6.1
NetOpamp_2: Opamp.2 Opamp.6 power.2 SMA_DAC.P T1.1 | length 4046.9
  Top Layer w15: SMA_DAC.P@3521,1099 SMA_DAC.P@3535,1085 ; v2@4598.5,2457 v2(4608.5,2447) ; v1(5154,2280) 5229,2355 5472,2355 5472,2427 5530,2485 5600,2485 5613,2472 Opamp.6@5613,2408.07 ; 5476.07,2354.93 5524.07,2354.93 5588,2291 Opamp.2@5588,2239
  Top Layer w50: SMA_DAC.P 3521,1096 3521,1099 3521,1331 3571,1381 3931,1381 ; T1.1@3875,1120 3931,1176 3931,1381 ; v2@4605,2445 4590,2430 4331,2430 4222,2321 4222,2043 3931,1752 power.2 3931,1381
  Bottom Layer w15: v2(4608.5,2447) 4616,2447 4626,2457 4653,2430 4653,2303.77 4660.77,2296 4845.5,2296 4890.5,2251 5125,2251 v1(5154,2280)
PB4_MISO: ATMEGA328.16 DAC.9 H1.1 | length 3789.6
  Top Layer w15: v1(4750,1665) 4752.5,1662.5 DAC.9 ; v1(4756,3229) 4756,3231 4786,3261 5253.33,3261 ATMEGA328.16 5259.76,3308.24 5240,3328 5240,3438 5271,3469 5587.23,3469 5588.23,3470 v1(5584,3470) ; H1.1 5590,3790 5735,3645 v1(5735,3625)
  Bottom Layer w15: v1(4750,1665) 4743,1658 4597,1658 4548,1707 4548,2497 4592,2541 4592,2640 4792.5,2840.5 4792.5,3035.92 4753.5,3074.92 4753.5,3226.5 v1(4756,3229) ; v1(5584,3470) 5617,3470 5657,3430 5695,3430 5735,3470 v1(5735,3625)
PB5_SCK: ATMEGA328.17 DAC.6 H1.3 R17.2 | length 3744.7
  Top Layer w15: v1(4699,1754) 4699,1746 4707.5,1737.5 DAC.6 ; v1(4805,3195) 5200.2,3195 ATMEGA328.17 ; v1@4807,3197 4835,3225 v1(5065,3225) ; v1(5065,3305) 5065,3372 5182,3489 5182,3562 5230,3610 R17.2@5230,3803 ; R17.2@5220,3803 R17.2@5230,3803 ; R17.2@5230,3817.6 R17.2@5230,3803 ; v1(5407,3832) 5383,3832 5354,3803 R17.2@5230,3803
  Bottom Layer w15: v1(4699,1754) 4615,1754 4569.5,1799.5 4569.5,2479.75 4625,2535.25 4625,2625 4814,2814 4814,3044.82 4785,3073.82 4785,3175 v1(4805,3195) ; v1(5065,3225) v1(5065,3305) ; v1(5407,3832) 5627,3832 5690,3895 H1.3
RESET: ATMEGA328.29 C15.1 H1.5 R5.1 SW1.1 SW1.2 | length 5588.4
  Top Layer w15: v1(4815,3290) R5.1@4910.2,3290 ; v1(4953,3120) 4953,3127 4980.87,3099.13 4980.87,2969.87 v1(4979,2968) ; v1(5104,2920) 5110,2920 5186,2844 v1(5364,2844) 5379,2844 5385.75,2850.75 ATMEGA328.29 ATMEGA328.29@5385,2924.69 ; v1(5364,2718) v1@5522,2718 ; v1(5492.56,1605) 5390,1502.44 5390,1086.42 SW1.1@5717.95,1086.42 ; v1(5657,2857) 5733,2857 5783,2807 6228,2807 6228,3225.24 ; H1.5 6013.81,3945 6227.64,3731.17 6227.64,3225.24
  Bottom Layer w15: v1(4815,3290) 4815,3275 4953,3137 v1(4953,3120) ; v1(4979,2968) 5059,2968 5100,2927 v1@5100,2916 ; v1(5364,2718) v1(5364,2844) ; v1(5492.56,1605) 5499,1611.44 5499,2692.77 v1(5522,2715.77) 5522,2742 5637,2857 v1(5657,2857)
RX-I: ATMEGA328.30 R8.1 | length 1701.6
  Top Layer w15: R8.1 4010.2,2744.2 4031,2765 v1(4130,2765) ; v1(4643,2873) 4648,2868 4736.18,2868 4738.18,2870 v1(4921,2870) ; v1(5100,2833) 5142,2833 5166,2809 5392.75,2809 5415,2831.25 5415,2923.19 ATMEGA328.30
  Bottom Layer w15: v1(4130,2765) 4612,2765 4643,2796 v1(4643,2873) ; v1(4921,2870) 4935,2884 5007,2884 5058,2833 v1(5100,2833)
RXLED: FT231.P$14 LED4.1 | length 1174.3
  Top Layer w15: LED4.1@3881.3,3205 3899.3,3187 3939,3187 ; 3938,3188 3939,3187 ; 3941,3187 3939,3187 ; v1(4100,3015) 4016,3015 3949.5,3081.5 3949.5,3176.5 3939,3187 ; FT231.P$14 4658.39,3086.61 4713,3032 v1(4711,3032)
  Bottom Layer w15: v1(4100,3015) 4640.01,3015 4657.01,3032 v1(4711,3032)
SCL: ADC.10 ATMEGA328.28 | length 1300.4
  Top Layer w10: 4635,2508.18 4635,2486.18 4660,2461.18 ADC.10
  Top Layer w15: 4635,2508.18 4661.82,2535 4758,2535 v1(4772,2521) ; v1(5316,3037) 5316,3034 5355,2995 ATMEGA328.28@5355,2924
  Bottom Layer w15: v1(4772,2521) 4772,2622 4857,2707 4857,2898.01 4985.49,3026.5 5291.91,3026.5 5302.41,3037 v1(5316,3037)
SDA: ADC.9 ATMEGA328.27 | length 1241.9
  Top Layer w10: v1@4679.37,2496 4672,2488.63 4672,2472.52 4677.41,2467.11 4677.41,2432.28 ADC.9
  Top Layer w15: v1@4672,2503 v1(4672,2496) v1@4679.37,2496 ; v1(5271.93,3059.07) 5271.93,3021.83 5322.76,2971 ATMEGA328.27
  Bottom Layer w15: v1(4672,2496) 4672,2626.18 4671.59,2626.59 4835.5,2790.5 4835.5,2906.92 4976.58,3048 5283,3048 v1(5271.93,3059.07)
TX-O: ATMEGA328.31 R9.1 | length 2254.5
  Top Layer w15: R9.1 4010.2,2939.8 4168.2,2939.8 4178,2930 v1(4178,2831) ; v1(4484,2832) 4484,2741 4635,2590 4995,2590 v1(5035,2630) ; v1(5040,2763) 5050,2753 5498,2753 5552.12,2807.12 5552.12,2823.88 5532.23,2843.77 5448.74,2843.77 ATMEGA328.31
  Bottom Layer w15: v1(4178,2831) v1@4484,2831 ; v1@5040,2630 v1(5040,2763)
TX_LED: FT231.P$7 LED3.1 | length 559.4
  Top Layer w15: LED3.1@3913,3310 3962,3310 3987,3285 3987,3101 4001.39,3086.61 FT231.P$7
USBVCC: C7.2 C10.2 C13.2 FT231.P$12 H1.2 LDO.1 LDO.3 P1.1 R15.2 USB.1 | length 6954.4
  Top Layer w15: FT231.P$12 4540.2,3037.76 4621.76,3037.76 v1(4628,3044) ; v1(4655,3165) 4667,3177 4667,3368 4635,3400 4380,3400 4305.87,3474.13 C10.2 4305.87,3640.87 4585.87,3640.87 4695,3750 4826.57,3750 4980,3596.57 C13.2 4971,3526 4971,3499 4922,3450 v1(4922,3425) v1@4930,3425 ; v1(5534,3507) 5552.51,3525.51 5739.49,3525.51 USB.1 v1(5799,3417) ; P1.1@5740,1391.75 P1.1@5766.75,1365 ; 5740,1586.17 5744.38,1587.6 5754.41,1590.88 5765.14,1594.38 5745.15,1600.91 5745.15,1699.15 5780,1729.21 5780,2267 5823,2310 LDO.3 5855.2,2394.8 5946,2394.8 ; v1(5948,2462) 5948,2330 5929,2311 LDO.1 5949,2310 6087,2448 6161,2448 6214,2395 6214,2247 6155,2188 C7.2
  Top Layer w50: H1.2 5560,4015 5510,4015 5510,3755 5739.49,3525.51 ; P1.1@5740,1391.75 5740,1586.17
  Bottom Layer w15: v1(4628,3044) 4628,3138 v1(4655,3165) ; v1(4922,3425) 4930,3425 5000,3495 5522,3495 v1(5534,3507) ; v1(5799,3417) 5845,3371 5850.77,3371 5850.77,3365.23 5948,3268 v1(5948,2462)
VCC: ADC.8 ATMEGA328.4 ATMEGA328.6 ATMEGA328.18 C1.1 C3.2 C4.2 C5.2 C6.2 C9.2 DAC.5 DAC.21 DAC.23 LDO.5 Opamp.7 R2.1 R5.2 R6.1 R16.2 SMA_LDO.P T4.1 | length 11308.2
  Top Layer w10: 4677,2370 4694.5,2387.5 4694.5,2401.98 4699.37,2406.85 ADC.8 4699.37,2483.37 4706,2490 4873,2490 v1(4879,2496) ; C3.2 5084.57,1933.43 5107,1911 v1@5222.37,1911
  Top Layer w15: SMA_LDO.P@4485,4025 SMA_LDO.P v1(4485,3800) 4940,3800 5025,3715 5025,3477 4985,3437 4985,3362 ; v1(4675,4015) 4680,4020 T4.1 ; 4677,2370 4645,2370 4629.41,2354.41 4629.41,2194.02 4689,2134.43 4689,2070.06 4640,2021.06 C4.2 4675,1960 4690,1945 v1(4690,1835) ; v1(4685,1495) 4685,1547 4623,1609 4623,1768 v1(4690,1835) ; DAC.5 4762.5,1762.5 v1(4690,1835) ; v1(4879,2496) 4880,2495 4950,2495 R6.1 4960,2520 4975,2535 5007.23,2535 5008.23,2534 5131,2534 5131,2619.13 5529.13,2619.13 5561,2651 v1(5561,2656) ; v1(4890,2625) 4835,2625 4810,2650 R2.1 4884.8,2715.2 4959.61,2790 C6.2 ; v1(4980,1650) 4980,1680 5005,1705 5005,1745 5047.5,1787.5 DAC.21 5203.5,1787.5 5222.37,1806.37 v1@5222.37,1911 ; v1(4985,1837.5) DAC.23 ; R5.2@4985,3290 4985,3362 ; 5479,3079.92 5479,3137.24 ATMEGA328.6 ; ATMEGA328.4 5454.25,3074.25 5448,3080.5 5448,3092.81 5372.07,3168.74 ATMEGA328.18 5198.76,3162.07 5108.07,3162.07 v1(5105,3159) 4955.77,3159 4952.77,3156 4744,3156 4718,3182 4718,3188 4718,3248 4832,3362 4985,3362 ; Opamp.7@5587,2383 5587,2338 5625,2300 5680,2300 5715,2335 C5.2 ; v1(5648,2763) 5682,2763 5715,2730 C5.2 ; v1(5784,2365) 5784,2542 5778,2548 5820,2590 R16.2 5865,2645 5825,2685 C5.2 ; v1(5932,2059) 5930,2061 LDO.5 5930,2228.26 6099.74,2398 6129.74,2398 6155,2372.74 C9.2
  Bottom Layer w15: v1(4485,3800) 4655,3800 4675,3820 v1(4675,4015) ; v1(4685,1495) 4890,1495 4980,1585 v1(4980,1650) ; v1(4690,1835) 4692.5,1837.5 v1(4985,1837.5) ; v1(4879,2496) 4879,2614 v1(4890,2625) ; v1(5105,3159) 5105,3143.28 5149.28,3099 5338.5,3099 5359,3078.5 5359,3011.5 5235,2887.5 5235,1921 v1(5225,1911) ; v1(5561,2656) 5567,2662 5567,2693 5637,2763 v1(5648,2763) ; v1(5784,2365) 5787,2362 5787,2143 5871,2059 v1(5932,2059)
VCCx: HX.1 HX.4 HX.5 HX.8 HX.9 HX.12 HX.13 HX.16 HX.17 HX.20 HX.21 HX.24 HX.25 power.1 R4.2 SMA_VCCx.P T2.1
pads on no net: ATMEGA328.19 ATMEGA328.22 ATMEGA328.23 ATMEGA328.24 ATMEGA328.25 ATMEGA328.26 DAC.1 DAC.3 DAC.8 DAC.10 DAC.24 FT231.P$2 FT231.P$4 FT231.P$5 FT231.P$6 FT231.P$15 FT231.P$16 FT231.P$19 LDO.4 Opamp.1 Opamp.4 Opamp.8 P1.None USB.4

## Polygon pours and split planes (outlines as drawn)
VCCx on Top Layer "VCCX_cover_vccx" (solid, remove dead copper, pour order 0): 3055,3675 3050,4110 3865,4110 3865,1535 3760,1535 3055,1535
GND on Ground1 "Layer1_Ground1" (solid, remove dead copper, pour order 2): 3040,4110 6260,4110 6260,1015 6250,1005 3050,1005 3050,4105 3035,4120
GND on Ground2 "Layer2_ground2" (solid, remove dead copper, pour order 4): 3045,4110 3050,4115 6270,4115 6270,1015 6255,1000 3050,1000 3050,4110 3055,4115

## Keep-outs
Top Layer:
  lines w15: 6260,990 6265,995
Bottom Layer:
  lines w15: 3050,990 3865,990
Keep-Out Layer:
  lines w15: 3050,990 3050,4110 6270,4110 6270,1000 ; 3060,990 6260,990

## Other copper
Top Layer:
  rectangle net VCCx: 3775,1535 3865,1651

## Silkscreen, mask and mechanical layers (free items; w line width, h text height)
Top Overlay:
  text "V G" at 3170,3385 h40
  text "TELEDYNE LECROY" at 3520,2130 h40 r90
  text "E-LOAD Rev A_MAR18" at 3695,2120 h40 r90
  text "University of Colorado Boulder" at 3600,1820 h40 r90
  text "V G" at 3180,1625 h40

## Text inside footprints (layer, text, board x,y; h text height)
H1: Top Overlay "6" at 5850,4025 h40; Top Overlay "5" at 5850,3925 h40; Top Overlay "2" at 5490,4025 h40; Top Overlay "1" at 5510,3925 h40
HX: Top Overlay "2" at 3540.46,3115.91 h40 r90; Top Overlay "1" at 3070.25,3105.89 h40 r90; Mechanical 1 "2" at 3540.46,3115.91 h40 r90; Mechanical 1 "1" at 3070.65,3105.96 h40 r90
power: Top Overlay "1" at 3821.16,1416.85 h59.06; Top Overlay "2" at 3911.32,1416.85 h59.06; Top Overlay "3" at 4011.32,1416.85 h59.06
USB: Top Overlay "1" at 5921.92,3495.01 h40 r270; Mechanical 1 "1" at 5921.91,3494.99 h40 r270; Mechanical 1 "5" at 5921.9,3696.67 h40 r270